# Altium PCB GAINS_PCB.PcbDoc
Units mil, origin at the board's own origin, x right, y up, seen from the top; angles counter-clockwise.
Board outline 1800 x 2600 mil, 2 copper layers (Top Layer, Bottom Layer); 25 components, 64 nets, 160 pads, 11 vias.
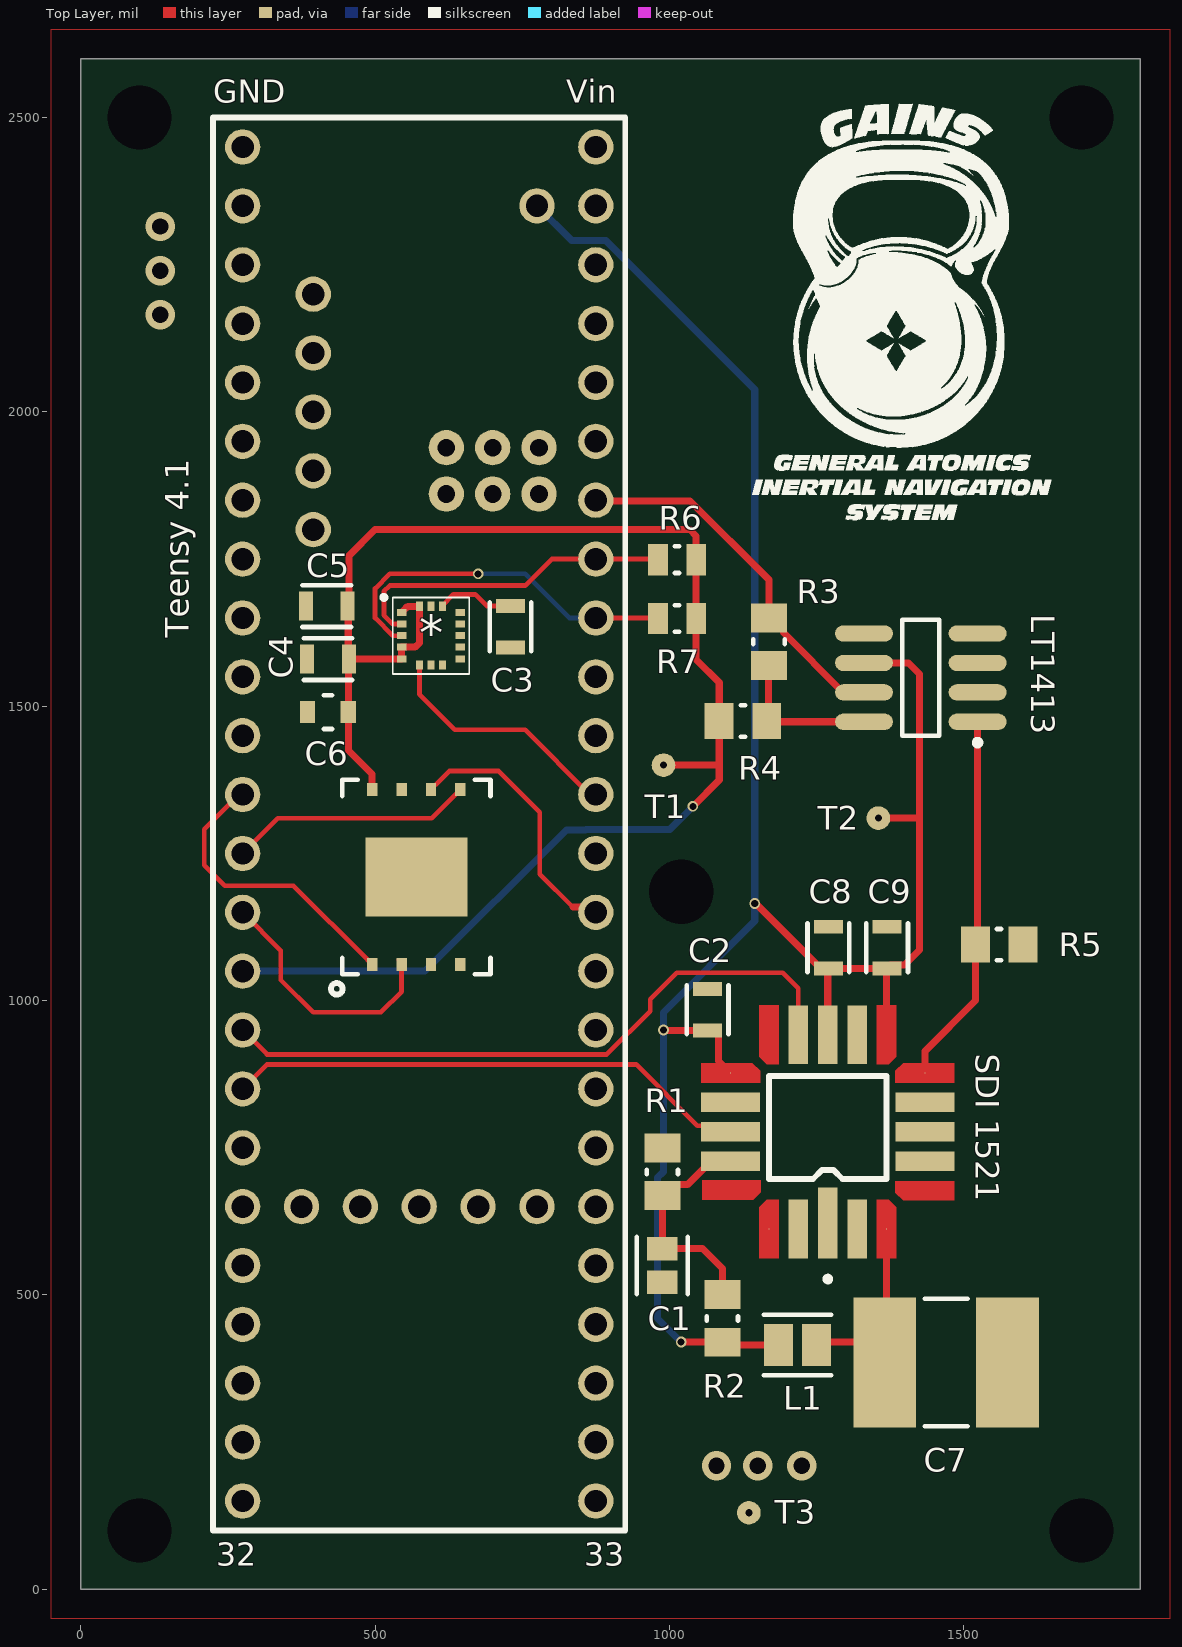
[diagram p0: Top Layer view]
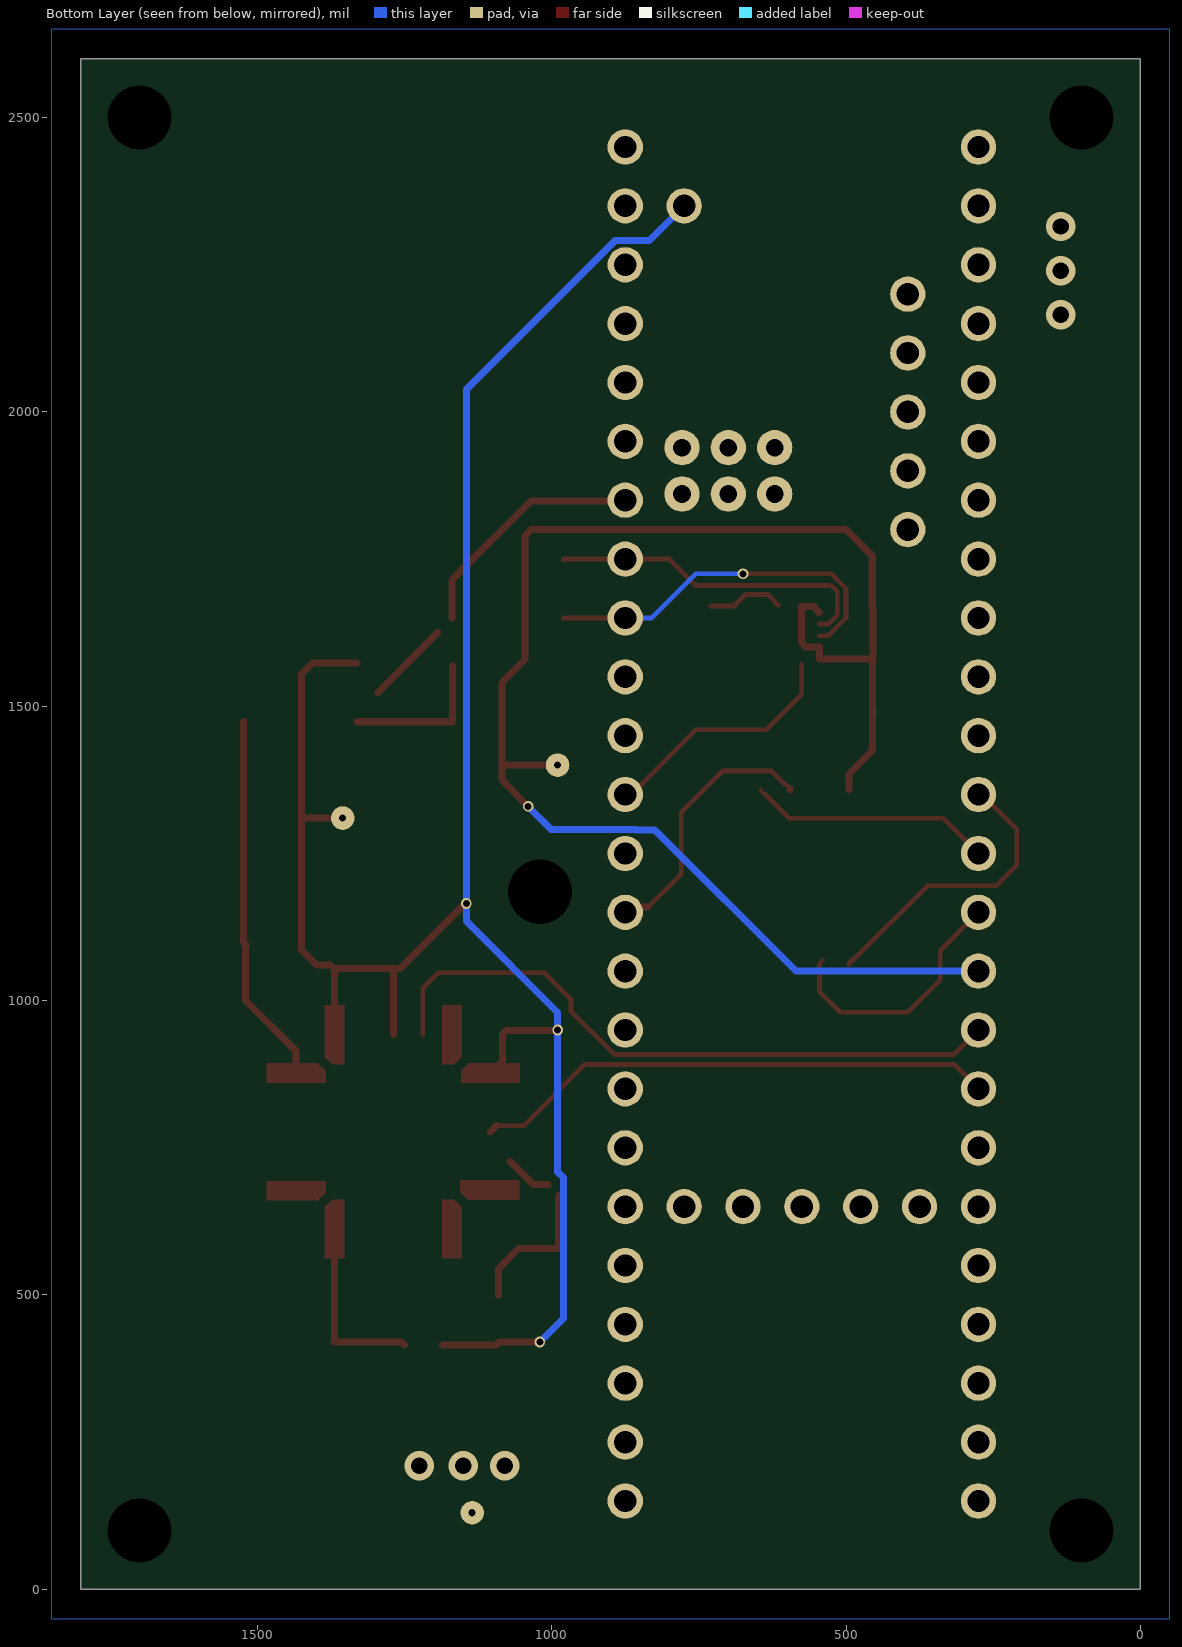
[diagram p1: Bottom Layer view, seen from below]

## Layer stack, top to bottom
Top Solder: solder mask 0.4, Solder Resist, Dk 3.5
Top Layer: signal copper 1.4
Dielectric 1: dielectric 12.6, FR-4, Dk 4.8
Bottom Layer: signal copper 1.4
Bottom Solder: solder mask 0.4, Solder Resist, Dk 3.5

## Board outline
1800,2600 0,2600 0,0 1800,0

## Design rules (kind name [scope] priority, off if disabled: settings)
BoardOutlineClearance [All] p1: gap=7.87 ignorepadtopadclearanceinfootprint=FALSE
Clearance [All] p1: gap=5 ignorepadtopadclearanceinfootprint=FALSE except(9.84: Arc-Hole Track-Hole SMDPad-Hole THPad-Hole Via-Hole Fill-Hole Poly-Hole Region-Hole Text-Hole)
ComponentClearance [All] p1: gap=5 collisioncheckmode=3 verticalgap=5 showdistances=TRUE
DiffPairsRouting [All] p1: maxlimit=10 minlimit=5 mostfreqgap=5 toplayer_minwidth=5 toplayer_maxwidth=1000 toplayer_prefwidth=5 bottomlayer_minwidth=5 bottomlayer_maxwidth=1000 bottomlayer_prefwidth=5 maxuncoupledlength=500
Height [All] p1: minheight=0 maxheight=71497.94 prefheight=500
HoleSize [All] p1: absolutevalues=TRUE maxlimit=248.03 minlimit=11.81 maxpercent=80.000 minpercent=20.000
HoleToHoleClearance [All] p1: gap=9.84 allowstackedmicrovias=FALSE
MinimumAnnularRing [All] p1: minimumring=3
MinimumSolderMaskSliver [All] p1: minsoldermaskwidth=0
PlaneClearance [All] p1: clearance=5
PlaneConnect PlaneConnectPowerPads [InPadClass('PowerPads')] p1: planeconnectstyle=Direct reliefexpansion=20 reliefentries=4 reliefconductorwidth=10 reliefairgap=10
PlaneConnect [All] p2: pad.planeconnectstyle=Relief pad.reliefexpansion=11.81 pad.reliefentries=4 pad.reliefconductorwidth=5 pad.reliefairgap=5 via.planeconnectstyle=Direct via.reliefexpansion=11.81 via.reliefentries=4 via.reliefconductorwidth=5 via.reliefairgap=5
PolygonConnect PolygonConnectPowerPads [All vs (InPadClass('PowerPads'))] p1: connectstyle=Direct reliefconductorwidth=10 reliefentries=4 polygonreliefangle="90 Angle" airgapwidth=10
PolygonConnect [All] p2: thpad.connectstyle=Relief thpad.reliefconductorwidth=12 thpad.reliefentries=4 thpad.polygonreliefangle="45 Angle" thpad.airgapwidth=5 smdpad.connectstyle=Relief smdpad.reliefconductorwidth=12 smdpad.reliefentries=4 smdpad.polygonreliefangle="90 Angle" smdpad.airgapwidth=5 via.connectstyle=Direct via.reliefconductorwidth=5 via.reliefentries=4 via.polygonreliefangle="90 Angle" via.airgapwidth=5
RoutingVias [All] p1: holewidth=11.81 width=23.62 viastyle="Through Hole" minholewidth=11.81 minwidth=23.62 maxholewidth=23.62 maxwidth=259.84
SilkToSilkClearance [All] p1: silktosilkclearance=0
SilkToSolderMaskClearance [IsPad] p1: minsilkscreentomaskgap=5 clearancetoexposedcopper=TRUE
SolderMaskExpansion [All] p1: expansion=2.95 istentingtop=FALSE
Width [All] p1: maxlimit=1000 minlimit=5 preferedwidth=5 minimp=50.000000 maximp=50.000000 favimp=50.000000
20 further rules are at their usual default settings.

## Classes and differential pairs
component class "SDI-1521L - Accelerometer": C1 C2 C7 C8 C9 L1 LT1413 R1 R2 R3 R4 R5 "SDI 1521"
component class Main_Sheet: R6 R7 T1 T2 T3
component class "IAM-20380 - Gyroscope": * C3 C5 C6
differential pair AO: +AO_P -AO_N

## Components (designator, comment, footprint, x,y, rotation, side; value= is the part's Value field where it differs from the comment)
* "IAM-20380" "Gyro - IAM20380" 595,1620 r0 top
C1 "0.01uF" FP-GCM21B-0_15-IPC_C 988,550 r270 top
C2 "GJ821BR71H105KA12L" FP-GJ821B-0_1-MFG 1065,984.57 r90 top
C3 "GJ821BR71H105KA12L" FP-GJ821B-0_1-MFG 730,1635 r270 top
C4 "GJ821BR71H105KA12L" FP-GJ821B-0_1-MFG 420,1580 r180 top
C5 "GJ821BR71H105KA12L" FP-GJ821B-0_1-MFG 418,1670 r180 top
C6 "GCJ21BR72E103KXJ3L" FP-GCJ21B-0_2-MFG 420,1490 r180 top
C7 "KRM55QR71H106KH01K" FP-KRM55Q-6_1_5_3_3_9_1_2-MFG 1470,385 r0 top
C8 "GJ821BR71H105KA12L" FP-GJ821B-0_1-MFG 1270,1090 r90 top
C9 "GJ821BR71H105KA12L" FP-GJ821B-0_1-MFG 1370,1090 r90 top
L1 "LBM2016T330J" FP-LBM2016-1_6-0_2-IPC_B 1217.49,415 r0 top
LT1413 "LT1413" LT-S8-8_M 1427.09,1548.65 r180 top (schematic designator U2)
R1 "5k" RESC2013X50X30ML20T20 988,709 r90 top
R2 "5k" RESC2013X50X30ML20T20 1090,460 r90 top
R3 "5k" RESC2013X50X30ML20T20 1169.09,1609.65 r270 top
R4 "5k" RESC2013X50X30ML20T20 1125,1475 r180 top
R5 "4.7k" RESC2013X60X30ML20T20 1560,1095 r180 top
R6 "10k" RESC2013X50X30LL20T20 1013,1749 r0 top
R7 "10k" RESC2013X50X30LL20T20 1013,1649 r0 top
"SDI 1521" "SDI-1521L" "SDI 1521L" 1269,777 r180 top (schematic designator U1)
T1 "TEST_POINT" PCBComponent_1 990,1400 r90 top
T2 "TEST_POINT" PCBComponent_1 1355,1310 r270 top
T3 "TEST_POINT" PCBComponent_1 1135,130 r90 top
"Teensy 4.1" "TEENSY 4.1" Teensy4_1 575,650 r270 top (schematic designator MD1)
? "GD5F1GQ4UFYIGY" SON127P800X80_HS-9N 570,1210 r90 top

## Footprints (in the part's own frame and the unit in brackets; to place one, negate y for a bottom-side part, rotate by r counter-clockwise, add the part's x,y. Pads: shape width x height; smd on the part's side, far side on the other; paste and mask are expansions set on the pad)
FP-GCJ21B-0_2-MFG [mm]
  rect 0.65x0.95 smd paste+0 mask+0: 1(-0.875,0) 2(0.875,0)
  silkscreen extent -0.18,-0.72 0.18,0.72, body extent -1.3,-0.82 1.3,0.82, height 0.25
FP-GCM21B-0_15-IPC_C [mil]
  rect 39.6x51.5 smd paste+0 mask+0: 1(-28.59,0) 2(28.59,0)
  silkscreen extent -48,-43 48,43, body extent -52,-31 52,31, height 10
FP-GJ821B-0_1-MFG [mm]
  rect 0.6x1.25 smd paste+0 mask+0: 1(-0.9,0) 2(0.9,0)
  silkscreen extent -1.05,-0.9 1.05,0.9, body extent -1.3,-0.77 1.3,0.77, height 0.25
FP-KRM55Q-6_1_5_3_3_9_1_2-MFG [mm]
  rect 2.7x5.6 smd paste+0 mask+0: 1(-2.65,0) 2(2.65,0)
  silkscreen extent -0.92,-2.75 0.92,2.75, body extent -4.1,-2.9 4.1,2.9, height 0.25
FP-LBM2016-1_6-0_2-IPC_B [mil]
  rect 49.41x71.11 smd paste+0 mask+0: 1(-32.51,0) 2(32.51,0)
  silkscreen extent -57,-51 57,51, body extent -67,-45 67,45, height 10
"Gyro - IAM20380" [mm]
  rect 0.4x0.3 smd mask+0.05: 1(-1.265,1) 2(-1.265,0.5) 3(-1.265,0) 4(-1.265,-0.5) 5(-1.265,-1) 9(1.265,-1) 10(1.265,-0.5) 11(1.265,0) 12(1.265,0.5) 13(1.265,1)
  rect 0.3x0.4 smd mask+0.05: 6(-0.5,-1.265) 7(0,-1.265) 8(0.5,-1.265) 14(0.5,1.265) 15(0,1.265) 16(-0.5,1.265)
  silkscreen extent -2.1,-1.65 1.65,1.72
LT-S8-8_M [mm] "SOIC, 8-Leads, Body 4.9x3.9mm, Pitch 1.27mm, IPC Low Density"
  oval 2.5x0.7 smd: 1(-2.45,1.905) 2(-2.45,0.635) 3(-2.45,-0.635) 4(-2.45,-1.905) 5(2.45,-1.905) 6(2.45,-0.635) 7(2.45,0.635) 8(2.45,1.905)
  silkscreen extent -2.58,-2.5 0.8,2.93, body extent -2,-2.5 2,2.5, height 1.76
PCBComponent_1 [mil]
  round 40 hole 12: 2(0,0)
RESC2013X50X30LL20T20 [mm] "Chip Resistor, 2-Leads, Body 2.00x1.25mm, IPC High Density"
  rect 0.85x1.35 smd: 1(-0.825,0) 2(0.825,0)
  silkscreen extent -0.1,-0.58 0.1,0.58, body extent -1.1,-0.72 1.1,0.72, height 0.5
RESC2013X50X30ML20T20 [mm] "Chip Resistor, 2-Leads, Body 2.00x1.25mm, IPC Low Density"
  rect 1.25x1.55 smd: 1(-1.025,0) 2(1.025,0)
  silkscreen extent -0.1,-0.67 0.1,0.67, body extent -1.1,-0.72 1.1,0.72, height 0.5
RESC2013X60X30ML20T20 [mm] "Chip Resistor, 2-Leads, Body 2.00x1.25mm, IPC Low Density"
  rect 1.25x1.55 smd: 1(-1.025,0) 2(1.025,0)
  silkscreen extent -0.1,-0.67 0.1,0.67, body extent -1.1,-0.72 1.1,0.72, height 0.6
"SDI 1521L" [mm]
  rect 0.84x3.05 smd mask+0.102: 1(0,3.935)
  rect 0.84x2.54 smd mask+0.102: 2(-1.27,4.19) 10(-1.27,-4.19) 11(0,-4.19) 12(1.27,-4.19) 20(1.27,4.19)
  round 0.025 smd mask+0.102: 3(-2.54,4.191) 4(-4.19,2.54) 8(-4.191,-2.54) 9(-2.54,-4.191) 13(2.54,-4.191) 14(4.191,-2.54) 18(4.154,2.515) 19(2.54,4.191)
  rect 2.54x0.84 smd mask+0.102: 5(-4.19,1.27) 6(-4.19,0) 7(-4.19,-1.27) 15(4.19,-1.27) 16(4.19,0) 17(4.19,1.27)
  Top Layer region: -2.12,-5.461 -2.96,-5.461 -2.96,-3.251 -2.63,-2.921 -2.12,-2.921
  Top Layer region: -5.461,-2.12 -5.461,-2.96 -3.251,-2.96 -2.921,-2.63 -2.921,-2.12
  Top Layer region: -2.12,5.461 -2.96,5.461 -2.96,3.251 -2.63,2.921 -2.12,2.921
  Top Layer region: -5.46,2.12 -5.46,2.96 -3.25,2.96 -2.92,2.63 -2.92,2.12
  Top Layer region: 2.12,5.461 2.96,5.461 2.96,3.251 2.63,2.921 2.12,2.921
  Top Layer region: 5.424,2.095 5.424,2.935 3.214,2.935 2.884,2.604 2.884,2.095
  Top Layer region: 5.461,-2.12 5.461,-2.96 3.251,-2.96 2.921,-2.63 2.921,-2.12
  Top Layer region: 2.12,-5.461 2.96,-5.461 2.96,-3.251 2.63,-2.921 2.12,-2.921
  silkscreen extent -2.54,-2.41 2.54,6.45
SON127P800X80_HS-9N [mm] "SON, 8-Leads, Body 6.00x8.00mm, Pitch 1.27mm, Thermal Pad 3.40x4.30mm, IPC Medium Density"
  rect 0.55x0.45 smd: 1(-3.775,1.905) 2(-3.775,0.635) 3(-3.775,-0.635) 4(-3.775,-1.905) 5(3.775,-1.905) 6(3.775,-0.635) 7(3.775,0.635) 8(3.775,1.905)
  rect 3.4x4.4 smd paste-2.15: 9(0,0)
  silkscreen extent -5.08,-3.2 4.2,3.68, body extent -4.05,-3.05 4.05,3.05, height 0.8
Teensy4_1 [mil] "Mircocontroller"
  round 60 hole 37.99: 0(-1700,-300) 1(-1600,-300) 2(-1500,-300) 3(-1400,-300) 4(-1300,-300) 5(-1200,-300) 6(-1100,-300) 7(-1000,-300) 8(-900,-300) 9(-800,-300) 10(-700,-300) 11(-600,-300) 12(-500,-300) 13(-500,300) 14(-600,300) 15(-700,300) 16(-800,300) 17(-900,300) 18(-1000,300) 19(-1100,300) 20(-1200,300) 21(-1300,300) 22(-1400,300) 23(-1500,300) 24(-300,-300) 25(-200,-300) 26(-100,-300) 27(0,-300) 28(100,-300) 29(200,-300) 30(300,-300) 31(400,-300) 32(500,-300) 33(500,300) 34(400,300) 35(300,300) 36(200,300) 37(100,300) 38(0,300) 39(-100,300) 40(-200,300) 41(-300,300) 42(-1800,300) 43(-1700,300) 44(-1600,300) 45(-400,300) 46(-1800,-300) 47(-400,-300) 48(-1700,200) 55(-1550,-180) 56(-1450,-180) 57(-1350,-180) 58(-1250,-180) 59(-1150,-180) 60(0,200) 61(0,100) 62(0,0) 63(0,-100) 64(0,-200)
  round 60 hole 30: 49(-1289.37,203.54) 50(-1210.63,203.54) 51(-1289.37,124.8) 52(-1210.63,124.8) 53(-1289.37,46.06) 54(-1210.63,46.06)
  silkscreen extent -1850,-350 550,350

## Part data
*: "IAM-20380 High Performance Gyroscope"
C1: library part CMP-06035-043554-1, "Ceramic Capacitor for Automotive 10nF ±1% 50VDC X8G 0805 Embossed T/R (GCM21B5G1H103FA16K)"
C2 C3 C4 C5 C8 C9: library part CMP-06035-063015-1, "CAP CER 1UF 50V X7R 0805", Capacitance=1uF, Case/Package=0805, Dielectric=X7R, Max Operating Temperature=125°C, Min Operating Temperature=-55°C, Tolerance=10%, Voltage Rating (DC)=50V, Depth=1.25mm, Length=2mm, Packaging="Tape and Reel"
C6: library part CMP-2007-03220-2, "CAP CER 10000PF 250V X7R 0805", Capacitance=10nF, Case Code (Imperial)=0805, Case Code (Metric)=2012, Dielectric=X7R, Max Operating Temperature=125°C, Min Operating Temperature=-55°C, Package Quantity=3000, Ratings=AEC-Q200, Tolerance=10%, Voltage Rating=250V, Case/Package=0805, Features="Soft Termination", Length=0.079inch, Mount="Surface Mount", Packaging="Tape and Reel", REACH SVHC="No SVHC", Termination=SMD/SMT, Thickness=0.057inch, Voltage Rating (DC)=250V, Width=0.049inch
C7: library part CMP-06035-058109-1, "Cap Ceramic 10uF 50V X7R ±10% SMD 2220 +125°C Emboss T/R", Capacitance=10uF, Case/Package=SMD/SMT, ESR (Equivalent Series Resistance)=100MR, Max Operating Temperature=125°C, Min Operating Temperature=-55°C, Package Quantity=1, Tolerance=10%, Voltage Rating=50V, Dissipation Factor=0.05%, Height=3.7mm, Length=0.24inch, Mount="Surface Mount", Packaging="Tape and Reel", Termination=SMD/SMT, Thickness=0.154inch, Voltage Rating (DC)=50V, Width=0.209inch
L1: library part CMP-14484-001407-1, "SMD Inductors 33uH ±5% 0.125A 4.68Ω 0806", Case Code (Imperial)=0806, Case Code (Metric)=2016, Current Rating=125mA, DC Resistance (DCR)=3.6R, Inductance=33uH, Max Operating Temperature=105°C, Min Operating Temperature=-40°C, Package Quantity=2000, Resistor Type=Wirewound, Self Resonant Frequency=15MHz, Test Frequency=2.52MHz, Tolerance=5%, Case/Package=0806, Core Material=Ferrite, DC Current=125mA, Depth=1.8mm, Halogen Free="Halogen Free", Height=1.6mm, Height - Seated (Max)=0.071inch, Lead Free="Lead Free", Length=2mm, Max DC Current=125mA, Military Standard=Not, Mount="Surface Mount", Packaging="Tape and Reel", Radiation Hardening=No, RoHS Compliant=Yes, Series=LB, Shielding=Unshielded, Termination=SMD/SMT, Width=0.063inch
LT1413: library part CMP-0359-02913-2, "Dual Channel, Precision Single Supply Operational Amplifier, 0.95 MHz Typical GBW, 0.3 V/us Typical SR, 3 to 22 V, 8-Pin SOIC (S8-8), Commercial, Pb-Free, Reel", Manufacturer="Linear Technology", PartNumber=LT1413S8#TRPBF, Channels (#)=2, ComponentLink1Description="Manufacturer URL", ComponentLink1URL=http://www.linear.com/, ComponentLink2Description=Datasheet, ComponentLink2URL=http://cds.linear.com/docs/en/datasheet/lt1413.pdf, ComponentLink3Description="Package Specification", ComponentLink3URL=http://cds.linear.com/docs/en/packaging/05081610_G_SO8.pdf, DatasheetVersion="Rev. 0", GBW (MHz) Typical=0.95, Is (mA) Typical=0.33, Linear Technology Part Number=LT1413, Mounting Technology="Surface Mount", PackageDescription="8-Pin Plastic Small Outline, Body 4.9 x 3.9 mm, Pitch 1.27 mm", PackageReference=LT-S8-8, PackageVersion="Rev G", Packing=Reel, RevisionNote="URLs updated", RoHS=Pb-Free, SR (V/us) Typical=0.3, Type=VFB, Vos (mV) Typical=0.05, Vs Max (V)=22, Vs Min (V)=3
R1 R2 R3 R4: library part CMP-2001-04239-1, "CRCW08055K00FKTA", Manufacturer="Vishay Dale", Part Number=CRCW08055K00FKTA
R5: library part CMP-2001-02407-1, "RK73H2ATTD4701F", Manufacturer="KOA Speer", Part Number=RK73H2ATTD4701F
R6 R7: library part CMP-2001-04257-1, "CRCW080510K0JNTA", Manufacturer="Vishay Dale", Part Number=CRCW080510K0JNTA
"SDI 1521": library part SDI1521L, "SDI1521L Accelerometer +/- 2G"
T1 T2 T3: "Test Point"
"Teensy 4.1": library part 080115a1ce54750370cf87ec145ee29, "TEENSY 4.1 (HEADERS)"
?: "FLASH - NAND Memory IC 1Gbit SPI - Quad I/O 120 MHz 8-WSON (6x8) - GD5F1GQ4UFYIGY", Supplier Part Number 1=1970-1081-1-ND, Supplier 1=Digi-Key

## Free pads (board coordinates)
  round 0 hole 109 unplated: 2(100,100) 2(100,2500) 2(1020,1185) 2(1700,100) 2(1700,2500)

## Via types
v1: diameter 50, hole 28, Top Layer to Bottom Layer, 6 vias
v2: diameter 18, hole 12, Top Layer to Bottom Layer, 5 vias

## Nets (pads, with @x,y where several pads share a name; then routed paths per layer and width w, separated by ;. In a path a pad name is that pad's centre, name@x,y a point inside that pad or via, vN(x,y) a via of type N, cw(c..) or ccw(c..) an arc to the next point about the centre after c; other vN are vias at no path point)
3V3: "Teensy 4.1.47" *.1 *.4 *.5 *.16 ?.8 C4.1 C5.1 C6.1 R4.2 R6.2 R7.2 T1.2 | length 2738.4
  Top Layer w12: ?.8 495,1385 455,1425 455,1489.45 C6.1 454.94,1490.49 454.94,1579.51 C4.1 ; *.1 546.98,1659.37 548.6,1660.99 548.6,1662.77 555.63,1669.8 *.16 575.32,1607.66 567.97,1600.32 *.4 *.5 456.06,1580.63 C4.1 ; T1.2 1085,1400 ; v2(1040,1330) 1084.65,1374.65 1084.65,1400 1084.65,1540.35 1045.48,1579.52 R7.2 R6.2 1045.48,1789.52 1035,1800 500,1800 455.4,1755.4 455.4,1670 454.43,1669.03 454.43,1581 C4.1
  Bottom Layer w12: 275,1050 585,1050 825,1290 857.02,1290 858.02,1291 1001,1291 v2(1040,1330)
AO_N: "SDI 1521.16" "Teensy 4.1.25" | length 893.7
  Top Layer w8: 275,850 316.5,891.5 943.5,891.5 1047.46,787.54 1093.5,787.54
  Top Layer w12: 1093.5,787.54 1104.04,777
AO_P: "SDI 1521.12" "Teensy 4.1.24" | length 1120.3
  Top Layer w8: 275,950 316.5,908.5 893.5,908.5 967.25,982.25 967.25,1002.25 1012.25,1047.25 1192.75,1047.25 1219,1021 1219,941.96
FLASH_CS: "Teensy 4.1.10" ?.1 | length 506.6
  Top Layer w6: 268.69,1350 275,1350
  Top Layer w8: 268.69,1350 210,1291.31 210,1230 245,1195 361.38,1195 488.17,1068.2 490.14,1068.2 495,1063.35 ?.1
FLASH_MISO: "Teensy 4.1.12" ?.2 | length 440.8
  Top Layer w6: ?.2@539.14,1069.2 545,1063.35 ?.2
  Top Layer w8: 275,1150 340,1085 340,1035 395,980 510,980 545,1015 ?.2
FLASH_MOSI: "Teensy 4.1.11" ?.5 | length 421.3
  Top Layer w6: 275,1250 280.15,1250 ; ?.5@637.17,1350.8 639.14,1350.8 645,1356.65 ?.5
  Top Layer w8: 275,1250 335,1310 596.38,1310 ?.5@637.17,1350.8
GND: "SDI 1521.2" "SDI 1521.5" "SDI 1521.6" "SDI 1521.18" "SDI 1521.19" "Teensy 4.1.43" "Teensy 4.1.45" "Teensy 4.1.46" *.8 *.9 *.10 *.11 *.12 *.13 *.15 ?.4 C1.2 C2.2 C3.2 C4.2 C5.2 C6.2 C7.2 C8.2 C9.2 LT1413.2 pad.2 R1.2 R5.1 T3.2
  other v1: 1080,210 1150,210 1225,210 135,2165 135,2240 135,2315
GYRO_INT: "Teensy 4.1.15" *.6 | length 420.1
  Top Layer w8: *.6 575.32,1520.32 635.63,1460 755,1460 865,1350
  Top Layer w12: 865,1350 875,1350
I_T: "SDI 1521.8" LT1413.1 R5.2 | length 634
  Top Layer w12: 1434,877 1434,914 1520,1000 1520,1094.65 R5.2 1523.55,1098.91 LT1413.1
Net*_7: *.7
Net*_14: *.14 C3.1 | length 130.9
  Top Layer w8: *.14@614.78,1671.68 633.1,1690 670,1690 689.57,1670.43 C3.1
Net_3: ?.3
Net_7: ?.7
NetC1_1: "SDI 1521.17" C1.1 R1.1 R2.2 | length 331
  Top Layer w12: R1.1 C1.1 1056.41,578.59 1090,545 R2.2 ; R1.1@1006.61,687.25 1030.83,687.25 1070.58,727
NetC7_1: "SDI 1521.3" C7.1 L1.2 | length 314.5
  Top Layer w12: L1.2 1255,420 1370,420 1369,421 1369,612
NetMD1_0: "Teensy 4.1.0"
NetMD1_1: "Teensy 4.1.1"
NetMD1_2: "Teensy 4.1.2"
NetMD1_3: "Teensy 4.1.3"
NetMD1_4: "Teensy 4.1.4"
NetMD1_5: "Teensy 4.1.5"
NetMD1_6: "Teensy 4.1.6"
NetMD1_7: "Teensy 4.1.7"
NetMD1_8: "Teensy 4.1.8"
NetMD1_9: "Teensy 4.1.9"
NetMD1_14: "Teensy 4.1.14"
NetMD1_16: "Teensy 4.1.16"
NetMD1_17: "Teensy 4.1.17"
NetMD1_21: "Teensy 4.1.21"
NetMD1_22: "Teensy 4.1.22"
NetMD1_23: "Teensy 4.1.23"
NetMD1_26: "Teensy 4.1.26"
NetMD1_27: "Teensy 4.1.27"
NetMD1_28: "Teensy 4.1.28"
NetMD1_29: "Teensy 4.1.29"
NetMD1_30: "Teensy 4.1.30"
NetMD1_31: "Teensy 4.1.31"
NetMD1_32: "Teensy 4.1.32"
NetMD1_33: "Teensy 4.1.33"
NetMD1_34: "Teensy 4.1.34"
NetMD1_35: "Teensy 4.1.35"
NetMD1_36: "Teensy 4.1.36"
NetMD1_37: "Teensy 4.1.37"
NetMD1_38: "Teensy 4.1.38"
NetMD1_39: "Teensy 4.1.39"
NetMD1_40: "Teensy 4.1.40"
NetMD1_41: "Teensy 4.1.41"
NetMD1_42: "Teensy 4.1.42"
NetMD1_44: "Teensy 4.1.44"
NetMD1_48: 
NetR3_2: LT1413.8 R3.2 R4.1 | length 257.2
  Top Layer w12: R3.2@1168.45,1568.65 1168.45,1473.65 LT1413.8
NetT3_2: 
NetU1_1: "SDI 1521.1"
NetU1_4: "SDI 1521.4"
NetU1_7: "SDI 1521.7"
NetU1_10: "SDI 1521.10"
NetU1_13: "SDI 1521.13"
NetU1_15: "SDI 1521.15"
NetU1_20: "SDI 1521.20"
SCL: "Teensy 4.1.19" *.2 R6.1 | length 565.3
  Top Layer w8: *.2 530.32,1639.69 515,1655 515,1695 525,1705 755,1705 800,1750 875,1750 979.52,1750 R6.1
SCLK: "Teensy 4.1.13" ?.6 | length 455.1
  Top Layer w6: ?.6@595,1360.59 600.86,1366.45 ?.6@602.83,1366.45
  Top Layer w8: ?.6@602.83,1366.45 626.38,1390 710,1390 780,1320 780,1215 836,1159
  Top Layer w12: ?.6 ?.6@595,1360.59 ; 836,1159 866,1159 875,1150
SDA: "Teensy 4.1.18" *.3 R7.1 | length 630
  Top Layer w8: *.3 530,1620 500,1650 500,1700 525,1725 v2(675,1725) ; 875,1650 979.52,1650 R7.1
  Bottom Layer w8: v2(675,1725) 755,1725 830,1650 875,1650
V_T: "Teensy 4.1.20" LT1413.7 R3.1 | length 558.6
  Top Layer w12: 875,1850 876,1849 1035,1849 1169.09,1714.91 R3.1 ; 1193.61,1625.24 LT1413.7@1295.2,1523.65
VDD: "SDI 1521.9" "SDI 1521.11" "SDI 1521.14" "Teensy 4.1.48" C2.1 C8.1 C9.1 L1.1 LT1413.6 R2.1 T2.2 | length 3746.4
  Top Layer w12: v2(990,950) 990.43,949.57 1064.57,949.57 C2.1 1077.8,949.13 1083.61,943.32 1083.61,897.39 1104,877 ; v2(1020,420) 1089.65,420 1094.65,415 L1.1 ; v2(1145,1165) 1146.77,1165 1257.2,1054.57 C8.1 ; 1269,941.96 1269,1053.57 C8.1 ; LT1413.6 1406.09,1573.65 1425.09,1554.65 1425.09,1310 ; T2.2 1425.09,1310 ; 1369,942 1369,1053.57 C9.1 ; C8.1 C9.1 ; C9.1 1375.81,1060.38 1399.64,1060.38 1425.09,1085.84 1425.09,1310
  Bottom Layer w12: 775,2350 834,2291 891.98,2291 1145,2037.98 v2(1145,1165) 1145,1135 990,980 v2(990,950) 990,709.19 980,699.19 980,460 v2(1020,420)
pads on no net: "Teensy 4.1.49" "Teensy 4.1.50" "Teensy 4.1.51" "Teensy 4.1.52" "Teensy 4.1.53" "Teensy 4.1.54" "Teensy 4.1.55" "Teensy 4.1.56" "Teensy 4.1.57" "Teensy 4.1.58" "Teensy 4.1.59" "Teensy 4.1.60" "Teensy 4.1.61" "Teensy 4.1.62" "Teensy 4.1.63" "Teensy 4.1.64" ?.9 LT1413.3 LT1413.4 LT1413.5

## Polygon pours and split planes (outlines as drawn)
GND on Bottom Layer "NONET_L02_P002" (solid, shelved, pour order 2): -50,2650 1850,2650 1850,-50 -50,-50
GND on Top Layer "NONET_L01_P003" (solid, shelved, pour order 3): -50,2650 1850,2650 1850,-50 -50,-50

## Silkscreen, mask and mechanical layers (free items; w line width, h text height)
Top Overlay:
  drawing of 44 lines, arcs and shapes, not listed

## Text inside footprints (layer, text, board x,y; h text height)
"Teensy 4.1": Top Overlay "GND" at 225,2525 h39.37; Top Overlay "32" at 230,40 h39.37; Top Overlay "33" at 855,40 h39.37; Top Overlay "Vin" at 825,2525 h39.37